# Altium PCB PCB1.PcbDoc (part 3 of 4)
Units mm, origin at the board's own origin, x right, y up, seen from the top; angles counter-clockwise.
Board outline 100 x 100 mm, 4 copper layers (Component Side 1, Ground Plane, Power Plane, Component Side 2), stack 0.844 mm thick; 174 components, 192 nets, 1098 pads, 545 vias.
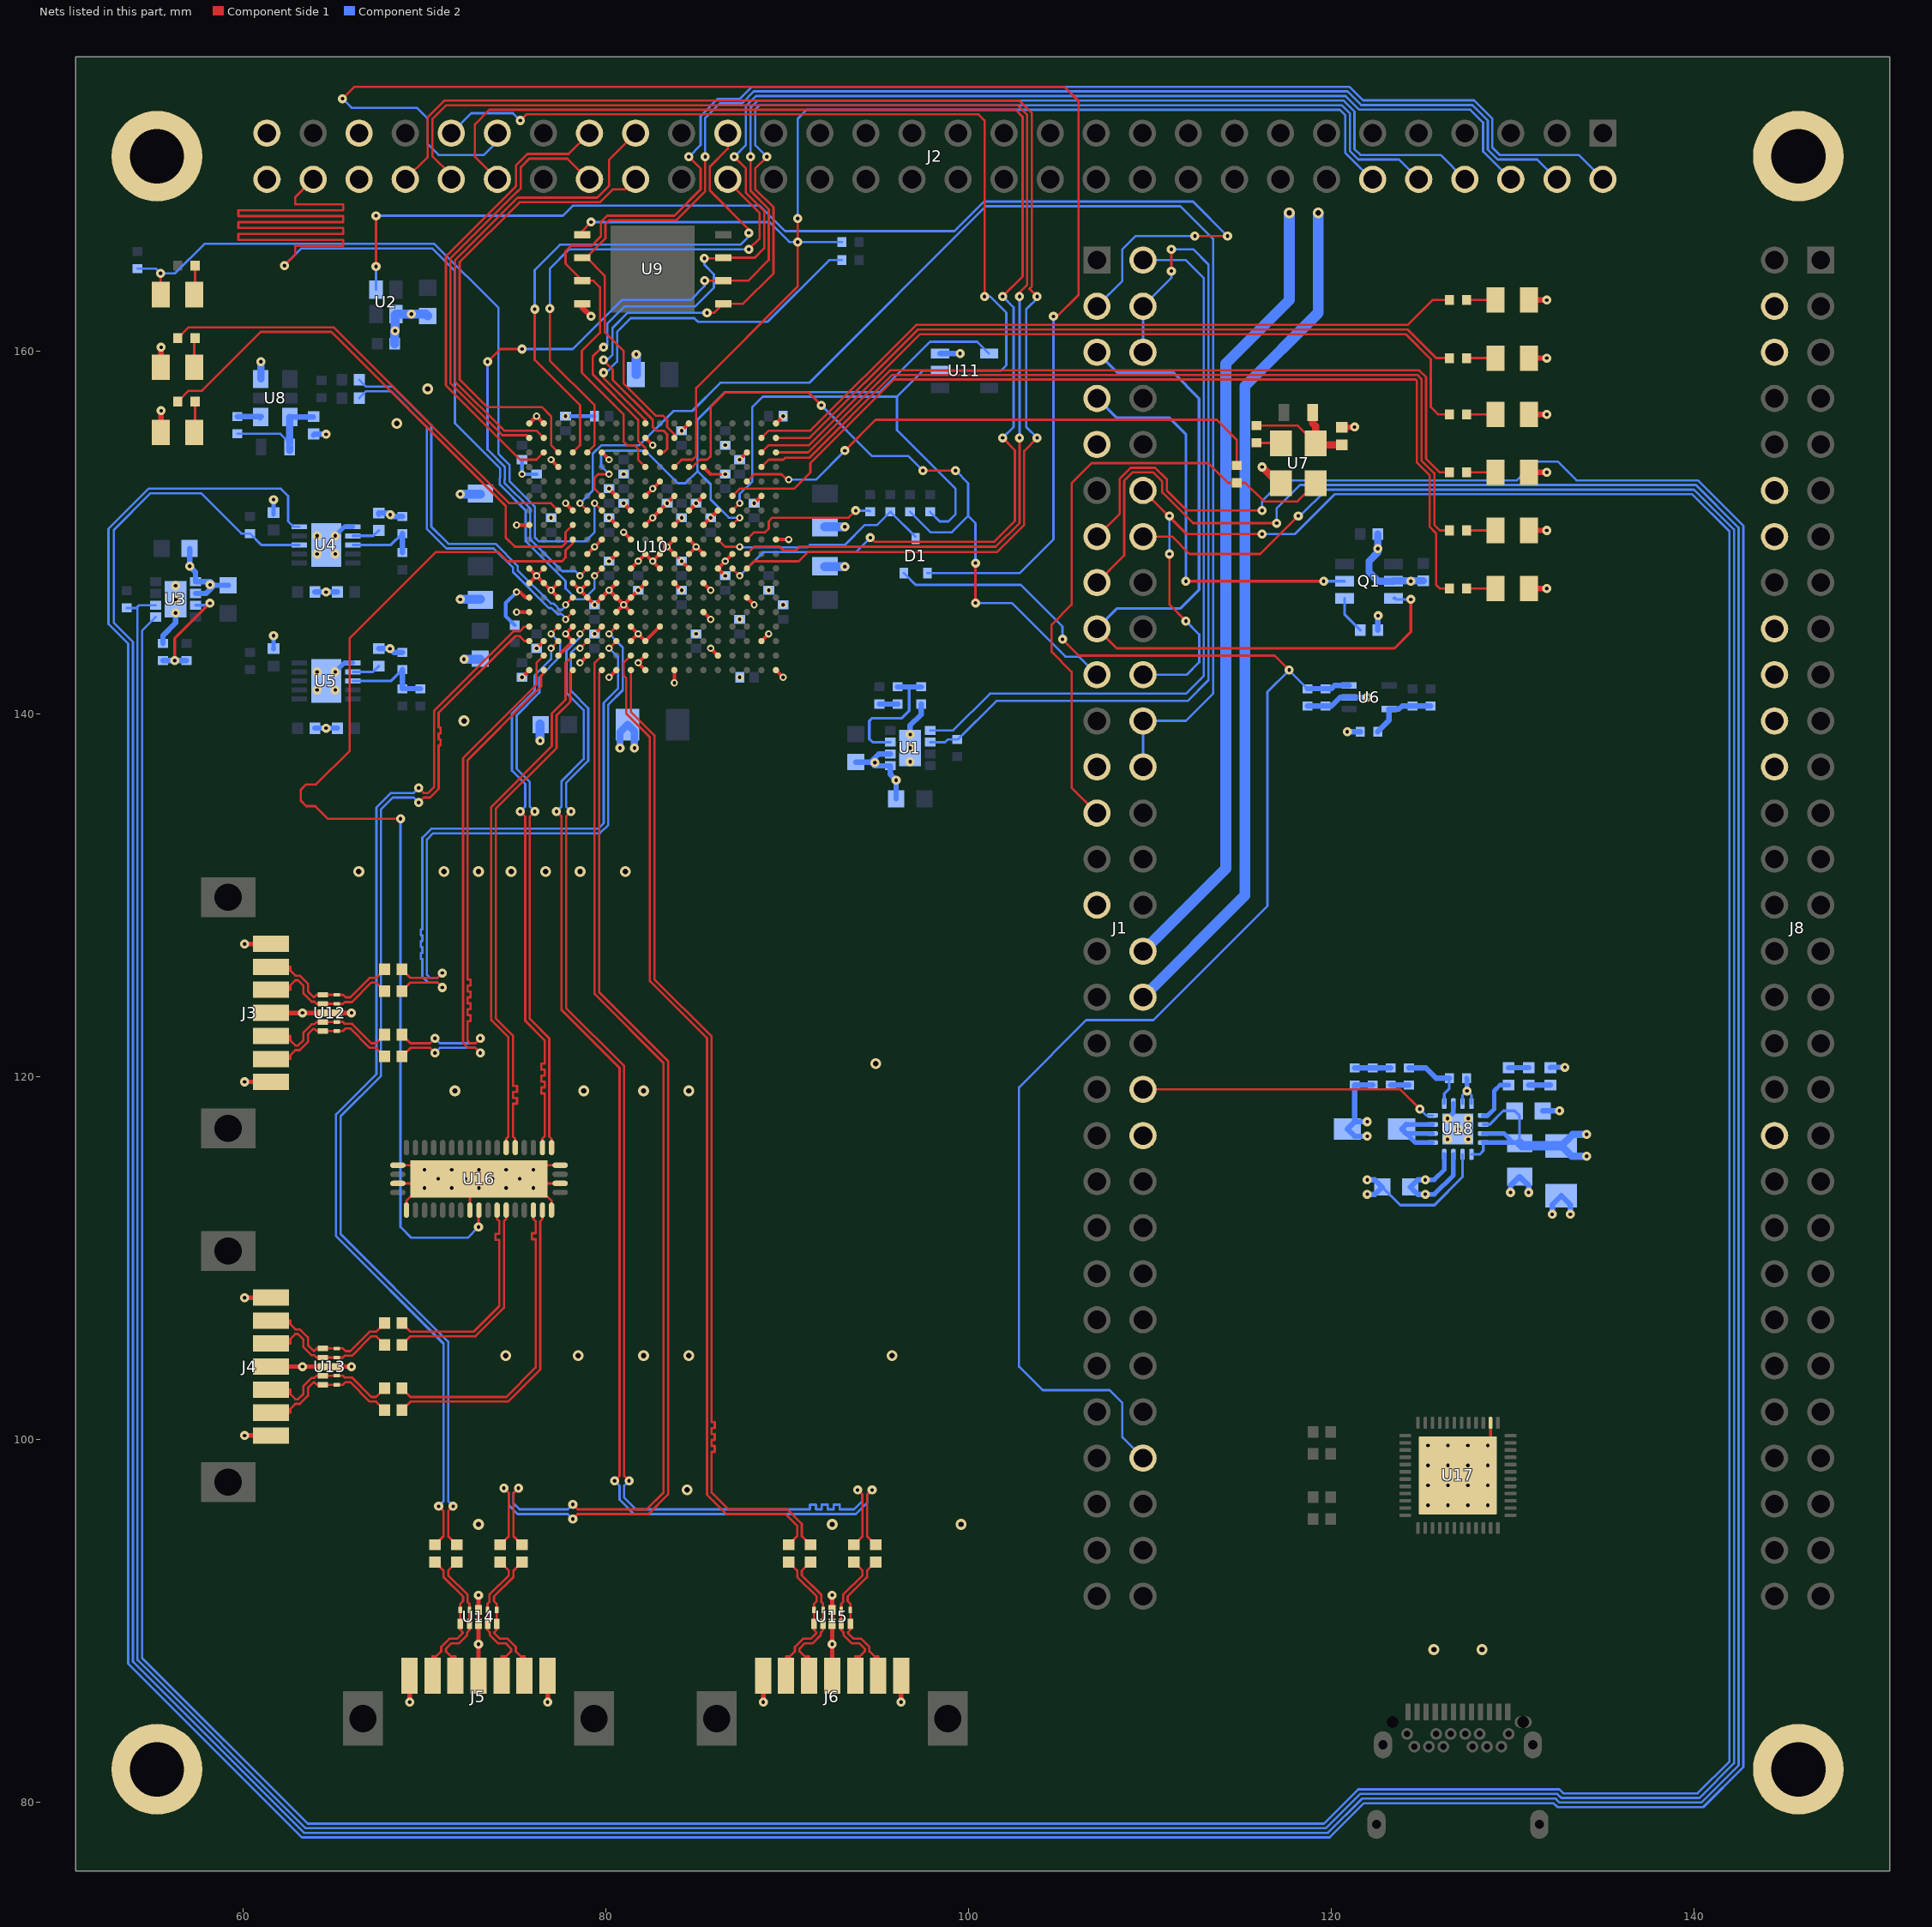
[diagram p4: the nets of this part, all layers, seen from the top]

## Via types
v1: diameter 0.5, hole 0.2, Component Side 1 to Component Side 2, 344 vias
v2: diameter 0.4, hole 0.2, Component Side 1 to Component Side 2, tented top, 149 vias
v3: diameter 0.6, hole 0.3, Component Side 1 to Component Side 2, 33 vias
v4: diameter 0.5, hole 0.2, Component Side 1 to Component Side 2, tented top, 14 vias
v5: diameter 0.5, hole 0.2, Component Side 1 to Component Side 2, tented bottom, 5 vias

## Nets (pads, with @x,y where several pads share a name; then routed paths per layer and width w, separated by ;. In a path a pad name is that pad's centre, name@x,y a point inside that pad or via, vN(x,y) a via of type N, cw(c..) or ccw(c..) an arc to the next point about the centre after c; other vN are vias at no path point) (continued)
B15_L14_N: J2.39 U10.D16 | length 30.8
  Component Side 1 w0.127: v1(76.1,162.3) 76.1,159.5 78.6,157 78.6,154.8 U10.D16@78.2,154.4 ; J2.39@86.74,172 86.74,171.14 85.754,170.154 85.754,168.846 87.9,166.7 v1(87.9,166.5)
  Component Side 2 w0.127: v1(76.1,162.3) 76.1,164.459 77.495,165.854 87.454,165.854 87.9,166.3 v1(87.9,166.5)
B15_L14_P: J2.40 U10.E16 | length 27.6
  Component Side 1 w0.127: v1(76.929,162.329) 76.929,159.471 79.4,157 79.4,154.8 U10.E16@79,154.4 ; J2.40@86.74,169.46 86.74,169.36 88.5,167.6 88.5,166.2 v1(87.9,165.6)
  Component Side 2 w0.127: v1(76.929,162.329) 76.929,164.529 78,165.6 v1(87.9,165.6)
B15_L15_N: J2.46 U10.A17 | length 23.6
  Component Side 1 w0.127: U10.A17@75.8,155.2 75.654,155.346 74.313,155.346 71.454,158.205 71.454,165.101 75.132,168.779 75.138,168.779 75.329,168.97 75.329,170.129 75.8,170.6 77.9,170.6 79.04,169.46 J2.46@79.12,169.46
B15_L15_P: J2.45 U10.B16 | length 25.8
  Component Side 1 w0.127: U10.B16@76.6,154.4 76.2,154 75.3,154 71.2,158.1 71.2,165.206 75.027,169.033 75.033,169.033 75.075,169.075 75.075,170.234 75.695,170.854 77.974,170.854 J2.45@79.12,172
B15_L16_N: J2.43 U10.B17 | length 26.6
  Component Side 1 w0.127: U10.B17@76.6,155.2 76.2,155.6 74.418,155.6 71.708,158.31 71.708,164.996 75.156,168.444 79.544,168.444 80.2,169.1 80.2,170.54 J2.43@81.66,172
B15_L16_P: J2.44 U10.C16 | length 26.1
  Component Side 1 w0.127: U10.C16@77.4,154.4 77,154.8 77,156.4 76.5,156.9 73.478,156.9 71.962,158.416 71.962,164.89 75.261,168.19 79.69,168.19 80.4,168.9 81.1,168.9 J2.44@81.66,169.46
BOOTMODE: J2.51 R27.2 U10.R12 U11.2 | length 75.2
  Component Side 1 w0.127: v1(75.3,172.7) 75.635,173.035 100.565,173.035 100.9,172.7 v1(100.9,163) ; U10.R12@87,151.2 v2(87.4,151.6)
  Component Side 2 w0.127: J2.51@71.5,172 72.6,173.1 74.9,173.1 v1(75.3,172.7) ; v2(87.4,151.6) 87.4,152.1 88.1,152.8 88.1,156.9 88.675,157.475 96.075,157.475 ; R27.2@97.9,151.125 98.425,150.6 98.9,150.6 99.3,151 99.3,152.4 96.075,155.625 96.075,157.475 ; v1(100.9,163) 101.2,163 102.1,162.1 102.1,159.2 101.8,158.9 U11.2@98.45,158.9 97.5,158.9 96.075,157.475
BOOTMODE_INV: U10.F13 U10.R11 U11.4 | length 35.2
  Component Side 1 w0.127: U10.F13@79.8,152 79.4,152.4 79.4,153 79.6,153.2 v2(80.2,153.2) ; U10.R11@87,150.4 v2(87.4,150.8)
  Component Side 2 w0.127: v2(80.2,153.2) 79.759,153.64 79.759,154.259 80,154.5 82.2,154.5 84,152.7 84.4,152.7 85.071,153.371 ; 85.085,153.385 85.071,153.371 ; v2(87.4,150.8) 86.8,150.8 85.8,151.8 85.8,152.642 85.071,153.371 ; U11.4@101.15,159.85 100.5,160.5 97.9,160.5 95.129,157.729 86.588,157.729 85.071,156.212 85.071,153.371
CFGVBS: J1.22 J1.24 U10.E12 | length 76.3
  Component Side 1 w0.127: v2(78.6,151.6) U10.E12@79,151.2
  Component Side 2 w0.127: v2(78.6,151.6) 79.3,152.3 79.3,154.322 79.778,154.8 81.871,154.8 83.755,156.684 84.783,156.684 86.336,158.237 91.237,158.237 100.975,167.975 111.7,167.975 113.5,166.175 113.5,141.1 112,139.6 J1.22@109.64,139.6 J1.24@109.64,137.06
CLK_25M: J1.25 R31.2 U7.3 | length 34.9
  Component Side 1 w0.127: J1.25@107.1,134.52 105.7,135.92 105.7,142.3 104.6,143.4 104.6,144.9 105.7,146 105.7,152.7 106.808,153.808 113.238,153.808 114.321,152.725 R31.2@114.8,152.725 115.275,152.725 116.3,151.7 118.15,151.7 U7.3@119.15,152.7
CLK_200M_N: C20.1 U10.D5 | length 20.8
  Component Side 1 w0.127: v2(77.8,145.2) U10.D5@78.2,145.6
  Component Side 2 w0.127: C20.1@66.43,157.4 66.803,157.773 68.168,157.773 70.146,155.795 70.146,150.195 71.233,149.108 73.833,149.108 74.905,148.036 74.905,147.795 76.88,145.82 77.02,145.82 77.368,145.473 77.6,145.473 77.8,145.273 v2(77.8,145.2)
CLK_200M_P: C21.1 U10.D6 | length 20.8
  Component Side 1 w0.127: v2(77.8,146) U10.D6@78.2,146.4
  Component Side 2 w0.127: C21.1@66.43,158.4 66.803,158.027 68.273,158.027 70.4,155.9 70.4,150.3 71.338,149.362 73.938,149.362 75.159,148.141 75.159,147.9 76.985,146.074 77.126,146.074 77.2,146 77.473,145.727 77.6,145.727 77.8,145.927 v2(77.8,146)
DBG_GLED: R34.2 U10.C12 | length 25.4
  Component Side 1 w0.127: R34.2@56.425,160.7 57.025,161.3 65,161.3 74.7,151.6 77,151.6 U10.C12@77.4,151.2
DBG_RLED: R33.2 U10.D11 | length 30.1
  Component Side 1 w0.127: R33.2@56.425,157.2 57.025,157.8 57.75,157.8 60.996,161.046 64.895,161.046 74.5,151.441 74.5,149.7 75,149.2 77.6,149.2 77.8,149.4 77.8,150 U10.D11@78.2,150.4
DONE: D2.1 R24.2 U10.F12 | length 42.6
  Component Side 1 w0.127: D2.1@55.475,163.1 v1(55.475,164.275) ; v2(79.4,151.6) U10.F12@79.8,151.2
  Component Side 2 w0.127: R24.2@54.2,164.525 55.225,164.525 v1(55.475,164.275) 56.275,164.275 57.9,165.9 70.559,165.9 74.1,162.359 74.1,154.318 74.708,153.71 74.708,152.81 75.9,151.618 76.108,151.41 76.108,149.71 76.318,149.5 78.9,149.5 79.4,150 v2(79.4,151.6)
GND: C1.1 C2.1 C3.1 C4.1 C5.1 C6.1 C7.1 C8.1 C9.1 C10.1 C11.1 C12.1 C13.1 C14.1 C15.1 C16.1 C17.1 C18.2 C19.2 C42.2 C43.2 C44.1 C47.1 C48.2 C49.1 C50.1 C51.1 C52.1 C53.1 C54.1 C55.1 C56.1 C57.1 C58.1 C59.1 C60.1 C61.2 C62.2 C63.2 C64.2 C65.2 C66.2 C67.1 C68.2 C69.1 C70.1 C71.1 C72.1 C73.1 C74.1 C75.1 C76.1 C77.1 C78.1 C79.1 C80.1 C81.1 C82.1 C83.1 C84.1 C85.1 C86.1 C87.1 C88.1 C89.1 D3.1 D4.1 D5.1 D6.1 D7.1 D8.1 D9.1 D10.1 J1.9 J1.23 J1.29 J2.59 J2.60 J3.1 J3.4 J3.7 J4.1 J4.4 J4.7 J5.1 J5.4 J5.7 J6.1 J6.4 J6.7 J8.12 J8.14 J8.22 J8.24 J8.40 pad. Q1.2 R3.1 R7.1 R9.2 R12.1 R17.1 R18.1 R19.1 R36.1 U1.5 U1.6 U1.9 U2.4 U3.5 U3.6 U3.9 U4.6 U4.11 U5.6 U5.11 U6.2 U7.2 U8.3 U9.4 U10.A1 U10.A5 U10.A7 U10.A8 U10.A11 U10.A18 U10.B3 U10.B7 U10.B8 U10.B18 U10.C2 U10.C6 U10.C7 U10.C15 U10.D3 U10.D4 U10.D7 U10.D12 U10.E2 U10.E6 U10.E7 U10.E9 U10.F4 U10.F6 U10.F10 U10.F16 U10.G1 U10.G5 U10.G6 U10.G7 U10.G9 U10.G11 U10.G13 U10.H3 U10.H4 U10.H5 U10.H6 U10.H8 U10.H10 U10.H12 U10.J1 U10.J2 U10.J3 U10.J7 U10.J9 U10.J11 U10.J13 U10.J17 U10.K4 U10.K8 U10.K9 U10.K10 U10.K12 U10.K14 U10.L1 U10.L7 U10.L9 U10.L10 U10.L11 U10.L13 U10.M8 U10.M9 U10.M10 U10.M12 U10.M18 U10.N5 U10.N7 U10.N9 U10.N11 U10.N13 U10.N15 U10.P2 U10.P8 U10.P12 U10.R9 U10.T6 U10.T16 U10.U3 U10.U13 U10.V1 U10.V10 U10.V18 U11.3 U12.3 U12.8 U13.3 U13.8 U14.3 U14.8 U15.3 U15.8 U16.18 U16.20 U16.22 U16.29 U16.38 U16.40 U16.42 U16.43 U17.38 U17.49 U18.6 U18.7 U18.8 U18.15 U18.16 U18.17 | length 188
  Component Side 1 w0.127: U16.20@68.55,114.1 69.775,114.1 v4(70.025,113.85) 69.725,113.85 69.025,113.15 U16.22@69.025,112.625 ; U16.18@68.55,115.1 72.275,115.1 U16.43@73.025,114.35 ; U16.29@72.525,112.625 72.525,113.85 U16.43@73.025,114.35 ; v2(76.2,147.6) U10.B8@76.6,148 ; U16.38@77.025,112.625 77.025,113.15 76.325,113.85 v4(76.025,113.85) 76.275,114.1 U16.40@77.5,114.1 ; U16.42@77.5,115.1 73.775,115.1 U16.43@73.025,114.35 ; U10.L9@83.8,148.8 v2(84.2,148.4) ; v2(86.6,153.2) v2@86.612,153.211
  Component Side 1 w0.149: 85.8,153.2 v2(86.6,153.2)
  Component Side 1 w0.153: U17.49@127,98 128.8,99.8 U17.38@128.8,100.9
  Component Side 1 w0.2: v2(75.1,145.6) U10.A5@75.8,145.6 ; v2(75.1,150.4) U10.A11@75.8,150.4 ; v2(75.4,142) U10.A1@75.8,142.4 ; U10.A7@75.8,147.2 v2(76.2,147.6) ; U10.A8@75.8,148 v2(76.2,147.6) ; U10.A18@75.8,156 v2(76.2,156.4) U10.B18@76.6,156 ; v2(76.2,143.6) U10.B3@76.6,144 ; v2(77,154) U10.C15@77.4,153.6 ; U10.C2@77.4,143.2 U10.D3@78.2,144 v2(77.8,144.4) U10.D4@78.2,144.8 ; U10.C6@77.4,146.4 v2(77,146.8) ; U10.C7@77.4,147.2 v2(77,146.8) ; v2(77.8,151.6) U10.D12@78.2,151.2 ; U10.D7@78.2,147.2 v2(78.6,146.8) ; v2(78.6,142.8) U10.E2@79,143.2 ; U10.E7@79,147.2 v2(78.6,146.8) ; U10.E9@79,148.8 v2(79.4,149.2) ; v2(79.4,144.4) U10.F4@79.8,144.8 ; v2(79.4,149.2) U10.F10@79.8,149.6 ; U10.F16@79.8,154.4 v2(80.2,154) ; v2(80.2,142) U10.G1@80.6,142.4 ; v2(80.2,148.4) U10.G9@80.6,148.8 ; v2(80.2,150.8) U10.G11@80.6,150.4 ; v2(80.2,152.4) U10.G13@80.6,152 ; U10.G5@80.6,145.6 v2(81,146) ; U10.G7@80.6,147.2 v2(80.2,146.8) ; v2(81,150) U10.H10@81.4,149.6 ; v2(81,151.6) U10.H12@81.4,151.2 ; U10.H3@81.4,144 v2(81.8,144.4) ; U10.H4@81.4,144.8 v2(81.8,144.4) ; U10.H5@81.4,145.6 v2(81,146) ; U10.H8@81.4,148 v2(81.8,148.4) U10.J9@82.2,148.8 v2(82.6,148.4) ; U10.J1@82.2,142.4 v2(81.8,142.8) U10.J2@82.2,143.2 ; U10.J7@82.2,147.2 v2(81.8,146.8) v2(81,146) ; U10.J11@82.2,150.4 v2(82.6,150.8) U10.K12@83,151.2 v2(83.4,151.6) U10.L13@83.8,152 ; U10.J13@82.2,152 v2(82.6,152.4) U10.K14@83,152.8 ; U10.J17@82.2,155.2 v2(82.6,154.8) ; U10.K4@83,144.8 U10.J3@82.2,144 v2(81.8,144.4) ; U10.K8@83,148 v2(82.6,148.4) ; U10.K10@83,149.6 v2(83.4,149.2) ; v2(83.8,141.7) U10.L1@83.8,142.4 ; U10.L7@83.8,147.2 v2(84.2,146.8) ; U10.L9@83.8,148.8 v2(83.4,149.2) ; U10.L10@83.8,149.6 v2(83.4,149.2) ; U10.L11@83.8,150.4 v2(84.2,150.8) ; v2(84.2,148.4) U10.M8@84.6,148 ; v2(84.2,155.6) U10.M18@84.6,156 ; U10.M9@84.6,148.8 v2(85,149.2) ; U10.M10@84.6,149.6 v2(85,149.2) ; U10.M12@84.6,151.2 v2(85,151.6) U10.N13@85.4,152 ; U10.N5@85.4,145.6 v2(85.8,145.2) ; U10.N7@85.4,147.2 v2(85.8,146.8) ; U10.N9@85.4,148.8 v2(85,149.2) ; U10.N11@85.4,150.4 v2(85.8,150.8) U10.P12@86.2,151.2 ; U10.N15@85.4,153.6 85.8,153.2 ; v2(85.8,143.6) U10.P2@86.2,143.2 ; v2(86.6,147.6) U10.P8@86.2,148 v2(86.6,148.4) U10.R9@87,148.8 ; v2(87.4,154) U10.T16@87.8,154.4 ; U10.T6@87.8,146.4 v2(88.2,146) ; v2(88.2,151.6) U10.U13@88.6,152 ; U10.U3@88.6,144 v2(89,144.4) ; U10.V1@89.4,142.4 v2(89.8,142) ; U10.V10@89.4,149.6 v2(90.1,149.6) ; U10.V18@89.4,156 v2(89.8,156.4) ; v2(76.2,147.6) U10.B7@76.6,147.2 v2(77,146.8) ; v2(78.6,146.8) U10.E6@79,146.4 v2(79.4,146) v2(80.2,146.8) ; v2(80.2,146.8) v2(81,146) ; v2(82.6,148.4) U10.K9@83,148.8 v2(83.4,149.2)
  Component Side 1 w0.254: v1(60.1,100.2) J4.1@61.557,100.2 ; v1(60.1,107.8) J4.7@61.557,107.8 ; v1(60.1,119.7) J3.1@61.557,119.7 ; v1(60.1,127.3) J3.7@61.557,127.3 ; J4.4@61.557,104.001 J4.4@61.557,104.001 v1(63.3,104) U13.3@64.415,104 U13.8@65.185,104 v1(66,104) ; J3.4@61.557,123.501 J3.4@61.557,123.501 v1(63.3,123.5) U12.3@64.415,123.5 U12.8@65.185,123.5 v1(66,123.5) ; J5.7@69.189,86.957 69.2,86.946 v1(69.2,85.5) ; J5.4@72.999,86.957 J5.4@72.999,86.957 v1(73,88.7) U14.3@73,89.815 U14.8@73,90.585 v1(73,91.4) ; v1(76.809,85.509) J5.1@76.809,86.957 ; J6.7@88.689,86.957 88.7,86.946 v1(88.7,85.5) ; J6.4@92.499,86.957 J6.4@92.499,86.957 v1(92.5,88.7) U15.3@92.5,89.815 U15.8@92.5,90.585 v1(92.5,91.4) ; v1(96.3,85.5) J6.1@96.3,86.957
  Component Side 1 w0.3: D3.1@55.475,155.5 55.5,155.525 v1(55.5,156.7) ; D4.1@55.475,159.1 55.5,159.125 v1(55.5,160.2) ; U9.4@78.71,162.595 78.71,162.39 v1(79.2,161.9) ; U7.2@117.1,152.7 117.25,152.85 U7.2@117.25,152.7 ; C18.2@120.6,155.78 121.38,155.78 121.36,155.8 v1(121.3,155.8) ; D9.1@130.925,146.9 v1(131.9,146.9) ; D5.1@130.925,150.1 v1(131.9,150.1) ; D7.1@130.925,153.3 v1(131.9,153.3) ; D10.1@130.925,156.5 v1(131.9,156.5) ; D6.1@130.925,159.6 v1(131.9,159.6) ; D8.1@130.925,162.8 v1(131.9,162.8)
  Component Side 1 w0.4: v1(116.2,153.6) U7.2@117.1,152.7
  Component Side 2 w0.127: C50.1@76.4,139.425 C50.1@76.425,139.4
  Component Side 2 w0.152: U18.7@127.25,118.5 127.25,118.95 v1(127.5,119.2) 127.75,118.95 U18.8@127.75,118.5
  Component Side 2 w0.2: C76.1@75.4,154 v2(75.4,153.2) C71.1@76.2,153.2 ; v2(77.8,156.4) C72.1@79.4,156.4
  Component Side 2 w0.25: v1(125.2,113.5) 125.7,113.5 126.75,114.55 U18.15@126.75,115.7 ; v1(125.2,114.3) 125.7,114.3 126.25,114.85 U18.16@126.25,115.7 ; v5(126.425,117.675) 126.75,118 U18.6@126.75,118.5
  Component Side 2 w0.254: C16.1@61.7,143.58 v1(61.7,144.3) ; C12.1@61.7,150.98 C12.1@61.7,151.08 v1(61.7,151.8) ; v1(65.1,142.3) 65.6,142.8 U5.6@66.075,142.8 ; v1(65.1,149.8) 65.6,150.3 U4.6@66.075,150.3 ; R36.1@127.475,119.9 127.5,119.875 v1(127.5,119.2)
  Component Side 2 w0.3: R7.1@55.6,143.875 55.6,144.3 56.3,145 v1(56.3,145.55) ; C8.1@57.075,149.1 v1(57.075,148.125) 57.4,147.8 U3.5@57.4,147.275 58.225,147.275 v1@58.425,147.075 ; U3.6@57.4,146.625 57.975,146.625 v1@58.425,147.075 ; C9.1@59.2,147.075 v1@58.425,147.075 ; C19.2@63.9,155.351 63.949,155.4 v1(64.6,155.4) ; C14.1@63.98,139.2 v1(64.6,139.2) C15.1@65.22,139.2 ; C10.1@63.98,146.7 v1(64.6,146.7) C11.1@65.22,146.7 ; C17.1@67.5,143.58 v1(68.12,143.58) 68.325,143.375 R12.1@68.8,143.375 ; C13.1@67.5,150.98 C13.1@67.58,151.06 ; C13.1@67.5,151.06 C13.1@67.58,151.06 ; R9.2@68.8,150.875 68.225,150.875 v1(68.133,150.967) 68.04,151.06 C13.1@67.58,151.06 ; C49.1@73.075,143 C49.1@73.1,143.025 ; C2.1@93.8,137.325 v1@94.625,137.325 ; U1.6@95.7,137.775 95.075,137.775 v1@94.625,137.325 ; C1.1@96.025,135.3 v1(96.025,136.325) 95.7,136.65 U1.5@95.7,137.125 94.825,137.125 v1@94.625,137.325 ; v1(96.8,138.85) 96.8,139.35 97.4,139.95 R3.1@97.4,140.525 ; U11.3@98.45,159.85 v1(99.55,159.85) ; R18.1@118.7,140.425 R17.1@119.7,140.425 120.025,140.425 120.5,140.9 U6.2@121,140.9 v1(122,140.9) ; v1(120.9,139) R19.1@121.625,139 ; C5.1@122.58,144.6 122.58,145.38 v1(122.6,145.4) ; v1(125.2,113.5) 124.775,113.5 C48.2@124.375,113.9 124.775,114.3 v1(125.2,114.3) ; v1(129.9,113.6) 129.9,113.975 C42.2@130.4,114.475 130.9,113.975 v1(130.9,113.6) ; C44.1@131.675,118.1 v1(132.6,118.1) ; C47.1@132.1,120.48 132.12,120.5 v1(132.9,120.5) ; v1(132.2,112.4) 132.2,112.925 C43.2@132.7,113.425 133.2,112.925 v1(133.2,112.4)
  Component Side 2 w0.4: U8.3@61,158.45 v1(61,159.4) ; v1(80.8,138.1) 80.8,138.975 C55.1@81.225,139.4 81.6,139.025 v1(81.6,138.1) ; C7.1@122.58,149.9 v1(122.58,149.1) 122.58,148.88 122.1,148.4 122.1,147.8 122.6,147.3 Q1.2@123.45,147.3 123.47,147.32 C6.1@125.1,147.32
  Component Side 2 w0.5: C3.1@68.38,160.4 68.38,161.08 v1(68.4,161.1) 68.4,161.975 U2.4@68.45,162.025 v1(69.3,162.025) 70.1,162.025 C4.1@70.2,161.925 ; v1(72,146.3) C67.1@73.1,146.3 ; v1(72,152.1) C70.1@73.1,152.1 ; v1(72.2,143) C49.1@73.075,143 ; v1(76.4,138.5) C50.1@76.4,139.425 ; C61.2@81.7,158.7 v1(81.7,159.8) ; C83.1@92.1,148.1 v1(93.2,148.1) ; C69.1@92.1,150.3 v1(93.2,150.3)
  other v1: 125.35,96.35 126.45,96.35 127.55,96.35 128.65,96.35 125.35,97.45 126.45,97.45 127.55,97.45 128.65,97.45 125.35,98.55 126.45,98.55 127.55,98.55 128.65,98.55 125.35,99.65 126.45,99.65 127.55,99.65 128.65,99.65 94.85,137.3 96.8,137.35 96.8,138.1 64.1,141.3 65.1,141.3 64.1,142.3 56.3,146.3 56.3,147.05 58.2,147.1 124.4,147.3 64.1,148.8 65.1,148.8 64.1,149.8
  other v2: 87.4,142 85,144.4 87.4,145.2 89.8,146 89,146.8 77,150.8 81,153.2 86.6,154.8
  other v3: 125.673,88.4 128.327,88.4 73,95.3 92.5,95.3 99.6,95.3 84.5,97.2 74.5,104.6 78.5,104.6 82.1,104.6 84.6,104.6 95.8,104.6 71.7,119.2 78.8,119.2 82.1,119.2 84.6,119.2 94.9,120.7 66.4,131.3 71.1,131.3 73,131.3 74.8,131.3 76.7,131.3 78.6,131.3 81.1,131.3 72.2,139.6 68.5,156 70.2,157.9
  other v4: 71.525,113.85 73.025,113.85 74.525,113.85 70.775,114.35 72.275,114.35 73.775,114.35 75.275,114.35 70.025,114.85 71.525,114.85 73.025,114.85 74.525,114.85 76.025,114.85
  other v5: 126.425,116.525 127.575,116.525 127,117.1 127.575,117.675
INIT: R25.2 U10.T10 | length 7.7
  Component Side 1 w0.127: U10.T10@87.8,149.6 88.2,150 88.8,150 89,150.2 89,150.6 89.2,150.8 93.41,150.8 v1(93.8,151.19)
  Component Side 2 w0.127: v1(93.8,151.19) 94.56,151.19 R25.2@94.6,151.15
J3_RX_N: C24.2 J3.5 U12.2 U12.9 | length 8.1
  Component Side 1 w0.127: J3.5@61.557,124.771 62.62,124.771 62.62,125.021 62.9,125.3 63.046,125.3 63.346,125 63.346,124.572 63.795,124.123 63.953,124.123 64.076,124 U12.2@64.415,124 U12.9@65.185,124 65.524,124 65.623,124.1 66.027,124.1 67.1,125.173 67.347,125.173 C24.2@67.82,124.7
J3_RX_P: C25.2 J3.6 U12.1 U12.10 | length 8.1
  Component Side 1 w0.127: J3.6@61.557,126.041 62.62,126.041 62.62,125.833 62.9,125.554 63.151,125.554 63.6,125.105 63.6,124.677 63.9,124.377 63.953,124.377 64.076,124.5 U12.1@64.415,124.5 U12.10@65.185,124.5 65.524,124.5 65.67,124.354 65.922,124.354 66.995,125.427 67.347,125.427 C25.2@67.82,125.9
J3_TX_N: C23.2 J3.3 U12.4 U12.7 | length 8.1
  Component Side 1 w0.127: J3.3@61.557,122.231 62.62,122.231 62.62,121.979 62.9,121.7 63.046,121.7 63.346,122 63.346,122.428 63.795,122.877 63.953,122.877 64.076,123 U12.4@64.415,123 U12.7@65.185,123 65.524,123 65.623,122.9 66.027,122.9 67.1,121.827 67.347,121.827 C23.2@67.82,122.3
J3_TX_P: C22.2 J3.2 U12.5 U12.6 | length 8.1
  Component Side 1 w0.127: J3.2@61.557,120.961 62.62,120.961 62.62,121.166 62.9,121.446 63.151,121.446 63.6,121.895 63.6,122.323 63.9,122.623 63.953,122.623 64.076,122.5 U12.5@64.415,122.5 U12.6@65.185,122.5 65.524,122.5 65.67,122.646 65.922,122.646 66.995,121.573 67.347,121.573 C22.2@67.82,121.1
J4_RX_N: C28.2 J4.5 U13.2 U13.9 | length 8.1
  Component Side 1 w0.127: J4.5@61.557,105.271 62.62,105.271 62.62,105.52 62.9,105.8 63.046,105.8 63.346,105.5 63.346,105.072 63.795,104.623 63.953,104.623 64.076,104.5 U13.2@64.415,104.5 U13.9@65.185,104.5 65.524,104.5 65.623,104.6 66.027,104.6 67.1,105.673 67.347,105.673 C28.2@67.82,105.2
J4_RX_P: C29.2 J4.6 U13.1 U13.10 | length 8.1
  Component Side 1 w0.127: J4.6@61.557,106.541 62.62,106.541 62.62,106.333 62.9,106.054 63.151,106.054 63.6,105.605 63.6,105.177 63.9,104.877 63.953,104.877 64.076,105 U13.1@64.415,105 U13.10@65.185,105 65.524,105 65.67,104.854 65.922,104.854 66.995,105.927 67.347,105.927 C29.2@67.82,106.4
J4_TX_N: C27.2 J4.3 U13.4 U13.7 | length 8.1
  Component Side 1 w0.127: J4.3@61.557,102.731 62.62,102.731 62.62,102.48 62.9,102.2 63.046,102.2 63.346,102.5 63.346,102.928 63.795,103.377 63.953,103.377 64.076,103.5 U13.4@64.415,103.5 U13.7@65.185,103.5 65.524,103.5 65.623,103.4 66.027,103.4 67.1,102.327 67.347,102.327 C27.2@67.82,102.8
J4_TX_P: C26.2 J4.2 U13.5 U13.6 | length 8.1
  Component Side 1 w0.127: J4.2@61.557,101.461 62.62,101.461 62.62,101.666 62.9,101.946 63.151,101.946 63.6,102.395 63.6,102.823 63.9,103.123 63.953,103.123 64.076,103 U13.5@64.415,103 U13.6@65.185,103 65.524,103 65.67,103.146 65.922,103.146 66.995,102.073 67.347,102.073 C26.2@67.82,101.6
J5_RX_N: C32.2 J5.5 U14.2 U14.9 | length 8.1
  Component Side 1 w0.127: J5.5@71.729,86.957 71.729,88.02 71.48,88.02 71.2,88.3 71.2,88.446 71.5,88.746 71.928,88.746 72.377,89.195 72.377,89.353 72.5,89.476 U14.2@72.5,89.815 U14.9@72.5,90.585 72.5,90.924 72.4,91.023 72.4,91.427 71.327,92.5 71.327,92.747 C32.2@71.8,93.22
J5_RX_P: C33.2 J5.6 U14.1 U14.10 | length 8.1
  Component Side 1 w0.127: J5.6@70.459,86.957 70.459,88.02 70.667,88.02 70.946,88.3 70.946,88.551 71.395,89 71.823,89 72.123,89.3 72.123,89.353 72,89.476 U14.1@72,89.815 U14.10@72,90.585 72,90.924 72.146,91.07 72.146,91.322 71.073,92.395 71.073,92.747 C33.2@70.6,93.22
J5_TX_N: C31.2 J5.3 U14.4 U14.7 | length 8.1
  Component Side 1 w0.127: C31.2@74.2,93.22 74.673,92.747 74.673,92.5 73.6,91.427 73.6,91.023 73.5,90.924 U14.7@73.5,90.585 U14.4@73.5,89.815 73.5,89.476 73.623,89.353 73.623,89.195 74.072,88.746 74.5,88.746 74.8,88.446 74.8,88.3 74.521,88.02 74.269,88.02 J5.3@74.269,86.957
J5_TX_P: C30.2 J5.2 U14.5 U14.6 | length 8.1
  Component Side 1 w0.127: C30.2@75.4,93.22 74.927,92.747 74.927,92.395 73.854,91.322 73.854,91.07 74,90.924 U14.6@74,90.585 U14.5@74,89.815 74,89.476 73.877,89.353 73.877,89.3 74.177,89 74.605,89 75.054,88.551 75.054,88.3 75.334,88.02 75.539,88.02 J5.2@75.539,86.957
J6_RX_N: C36.2 J6.5 U15.2 U15.9 | length 8.1
  Component Side 1 w0.127: J6.5@91.229,86.957 91.229,88.02 90.979,88.02 90.7,88.3 90.7,88.446 91,88.746 91.428,88.746 91.877,89.195 91.877,89.353 92,89.476 U15.2@92,89.815 U15.9@92,90.585 92,90.924 91.9,91.023 91.9,91.427 90.827,92.5 90.827,92.747 C36.2@91.3,93.22
J6_RX_P: C37.2 J6.6 U15.1 U15.10 | length 8.1
  Component Side 1 w0.127: J6.6@89.959,86.957 89.959,88.02 90.166,88.02 90.446,88.3 90.446,88.551 90.895,89 91.323,89 91.623,89.3 91.623,89.353 91.5,89.476 U15.1@91.5,89.815 U15.10@91.5,90.585 91.5,90.924 91.646,91.07 91.646,91.322 90.573,92.395 90.573,92.747 C37.2@90.1,93.22
J6_TX_N: C35.2 J6.3 U15.4 U15.7 | length 8.1
  Component Side 1 w0.127: C35.2@93.7,93.22 94.173,92.747 94.173,92.5 93.1,91.427 93.1,91.023 93,90.924 U15.7@93,90.585 U15.4@93,89.815 93,89.476 93.123,89.353 93.123,89.195 93.572,88.746 94,88.746 94.3,88.446 94.3,88.3 94.02,88.02 93.769,88.02 J6.3@93.769,86.957
J6_TX_P: C34.2 J6.2 U15.5 U15.6 | length 8.1
  Component Side 1 w0.127: C34.2@94.9,93.22 94.427,92.747 94.427,92.395 93.354,91.322 93.354,91.07 93.5,90.924 U15.6@93.5,90.585 U15.5@93.5,89.815 93.5,89.476 93.377,89.353 93.377,89.3 93.677,89 94.105,89 94.554,88.551 94.554,88.3 94.833,88.02 95.039,88.02 J6.2@95.039,86.957
LED1: R43.2 U10.R13 | length 53.2
  Component Side 1 w0.127: U10.R13@87,152 87.4,152.4 90.4,152.4 91.3,153.3 91.3,153.804 95.913,158.417 124.665,158.417 124.738,158.344 124.738,153.844 125.446,153.136 125.446,150.295 125.8,149.941 125.8,147.1 126,146.9 R43.2@126.525,146.9
LED2: R35.2 U10.U15 | length 47.9
  Component Side 1 w0.127: U10.U15@88.6,153.6 89,154 89.8,154 89.9,154.1 91.237,154.1 95.808,158.671 124.77,158.671 124.992,158.449 124.992,153.949 125.7,153.241 125.7,150.4 126,150.1 R35.2@126.525,150.1
LED3: R41.2 U10.V16 | length 44
  Component Side 1 w0.127: U10.V16@89.4,154.4 91.178,154.4 95.703,158.925 124.875,158.925 125.246,158.554 125.246,154.054 126,153.3 R41.2@126.525,153.3
LED4: R44.2 U10.U16 | length 44
  Component Side 1 w0.127: U10.U16@88.6,154.4 89,154.8 91.218,154.8 97.339,160.921 124.12,160.921 125.5,159.541 125.5,156.9 125.9,156.5 R44.2@126.525,156.5
LED5: R39.2 U10.V17 | length 40.3
  Component Side 1 w0.127: U10.V17@89.4,155.2 91.259,155.2 97.234,161.175 124.225,161.175 125.8,159.6 R39.2@126.525,159.6
LED6: R42.2 U10.U17 | length 41.1
  Component Side 1 w0.127: U10.U17@88.6,155.2 89,155.6 91.3,155.6 97.129,161.429 124.229,161.429 125.6,162.8 R42.2@126.525,162.8
MAIN_3V3: C48.1 J1.40 L3.2 R38.2 R40.2 U18.14 | length 14.3
  Component Side 2 w0.152: C48.1@122.825,113.9 123.825,112.9 125.7,112.9 127.25,114.45 U18.14@127.25,115.7
  Component Side 2 w0.3: v1(122,113.5) 122.425,113.5 C48.1@122.825,113.9 122.425,114.3 v1(122,114.3) ; v1(122,116.7) 121.3,116.7 L3.2@120.9,117.1 L3.2@121.3,117.5 ; v1(122,117.5) L3.2@121.3,117.5 ; R38.2@122.3,119.525 R40.2@121.3,119.525 L3.2@121.3,117.5
MAIN_3V3_PG: J1.38 U18.4 | length 16.6
  Component Side 1 w0.127: J1.38@109.64,119.28 123.82,119.28 v1(124.9,118.2)
  Component Side 2 w0.127: v1(124.9,118.2) 125.25,117.85 U18.4@125.6,117.85
MAIN_PWR: C42.1 C43.1 C44.2 J8.4 J8.6 J8.18 J8.20 U18.10 U18.11 U18.12 U18.13 | length 14.5
  Component Side 2 w0.152: U18.13@127.75,115.7 128.2,115.7 128.4,115.9 U18.12@128.4,116.35 ; U18.10@128.4,117.35 128.75,117.35 129.5,118.1 C44.2@130.125,118.1 130.4,117.825 C42.1@130.4,116.5 ; C42.1@130.375,116.35 C42.1@130.4,116.325
  Component Side 2 w0.25: U18.12@128.4,116.35 130.05,116.35 129.55,116.85 U18.11@128.4,116.85
  Component Side 2 w0.254: C42.1@130.05,116.35 C42.1@130.375,116.35
  Component Side 2 w0.4: v1(134.1,115.6) 133.275,115.6 C43.1@132.7,116.175 133.325,116.8 v1(134.1,116.8)
  Component Side 2 w0.5: C42.1@130.4,116.325 130.55,116.175 C43.1@132.7,116.175
MGT_PWR: J1.19 R29.2 U10.M15 | length 39.9
  Component Side 1 w0.127: U10.M15@84.6,153.6 84.8,153.6 85.2,154 85.6,154 85.8,154.2 85.8,156.9 86.6,157.7 91.2,157.7 v1(91.9,157) ; v1(97.5,153.4) v1(99.3,153.4) ; v1(100.4,146.1) v1(100.4,148.3)
  Component Side 2 w0.127: v1(91.9,157) 94.7,154.2 96.7,154.2 v1(97.5,153.4) ; R29.2@96.8,151.125 97.925,150 99.1,150 100,150.9 ; v1(99.3,153.4) 100,152.7 100,150.9 ; v1(100.4,146.1) 102.4,146.1 105.36,143.14 106.1,143.14 J1.19@107.1,142.14 ; v1(100.4,148.3) 100.4,150.5 100,150.9
MGTSW_RX_N: U10.C3 U16.2 | length 31.1
  Component Side 1 w0.127: v1(75.3,134.6) 75.573,134.327 75.573,123.068 76.648,121.993 76.648,121.3 76.648,121.025 76.648,120.698 76.463,120.698 76.463,120.371 76.648,120.371 76.648,120.044 76.463,120.044 76.463,119.717 76.648,119.717 76.648,119.391 76.463,119.391 76.463,119.064 76.648,119.064 76.648,118.9 76.648,116.687 76.525,116.564 U16.2@76.525,116.075 ; v2(77,143.6) U10.C3@77.4,144
  Component Side 2 w0.127: v1(75.3,134.6) 75.573,134.873 75.573,136.127 74.846,136.854 74.846,140.005 76.1,141.259 76.1,142.1 77,143 v2(77,143.6)
MGTSW_RX_P: U10.C4 U16.1 | length 31.1
  Component Side 1 w0.127: v1(76.1,134.6) 75.827,134.327 75.827,123.173 76.902,122.098 76.902,116.687 77.025,116.564 U16.1@77.025,116.075 ; v2(77,144.4) U10.C4@77.4,144.8
  Component Side 2 w0.127: v1(76.1,134.6) 75.827,134.873 75.827,136.232 75.1,136.959 75.1,139.9 76.354,141.154 76.354,141.995 77.5,143.141 77.5,143.9 77.3,144.1 v2(77,144.4)
MGTSW_SEL: U10.D10 U16.30 | length 59.9
  Component Side 1 w0.127: v1(68.7,134.2) 64.7,134.2 64,134.9 63.5,134.9 63.2,135.2 63.2,135.8 63.5,136.1 64.041,136.1 65.9,137.959 65.9,144.159 70.641,148.9 74.1,148.9 74.6,148.4 77.6,148.4 77.8,148.6 77.8,149 78.2,149.4 U10.D10@78.2,149.6 ; v1(73,111.7) 73,112.6 U16.30@73.025,112.625
  Component Side 2 w0.127: v1(68.7,134.2) 68.7,111.7 69.3,111.1 72.4,111.1 v1(73,111.7)
MGTSW_TX_N: U10.D1 U16.5 | length 29.4
  Component Side 1 w0.127: U16.5@75.025,116.075 75.025,116.564 74.9,116.689 74.9,118 74.9,118.164 74.9,118.49 75.126,118.49 75.126,118.817 74.9,118.817 74.9,119.144 75.126,119.144 75.126,119.471 74.9,119.471 74.9,120.7 74.9,122.259 73.954,123.205 73.954,134.754 77.3,138.1 77.3,139.9 78.054,140.654 78.054,142.254 U10.D1@78.2,142.4
MGTSW_TX_P: U10.D2 U16.6 | length 29.4
  Component Side 1 w0.127: U16.6@74.525,116.075 74.525,116.564 74.646,116.685 74.646,122.154 73.7,123.1 73.7,134.859 77.046,138.205 77.046,140.005 77.8,140.759 77.8,142.8 U10.D2@78.2,143.2
NetC5_2: C5.2 Q1.4 | length 2.1
  Component Side 2 w0.153: Q1.4@120.75,146.35 120.75,145.47 C5.2@121.62,144.6
NetC13_2: C13.2 U4.7 | length 1.5
  Component Side 2 w0.153: U4.7@66.075,149.8 67.2,149.8 C13.2@67.5,150.1
NetC17_2: C17.2 U5.7 | length 1.6
  Component Side 2 w0.153: U5.7@66.075,142.3 67.18,142.3 C17.2@67.5,142.62
NetC18_1: C18.1 L1.1 R20.1 U7.4 | length 7
  Component Side 1 w0.127: R20.1@115.9,155.875 118.175,155.875 U7.4@119.15,154.9
  Component Side 1 w0.3: L1.1@118.99,156.8 L1.1@119,156.79
  Component Side 1 w0.4: L1.1@119,156.79 119,156 119.15,155.85 U7.4@119.15,154.9 ; U7.4@119.23,154.82 C18.1@120.6,154.82
NetC19_1: C19.1 L2.1 R21.1 U8.6 | length 6.2
  Component Side 2 w0.127: R21.1@59.7,155.425 62.075,155.425 62.59,154.91 L2.1@62.59,154.7
  Component Side 2 w0.3: U8.6@62.6,156.35 C19.1@63.9,156.35
  Component Side 2 w0.4: L2.1@62.59,154.5 L2.1@62.59,154.7 ; L2.1@62.59,154.91 U8.6@62.59,156.34
NetC45_1: C45.1 C46.2 | length 1.1
  Component Side 2 w0.3: C45.1@129.8,120.48 C46.2@130.9,120.48
NetC45_2: C45.2 U18.9 | length 2.7
  Component Side 2 w0.25: U18.9@128.65,117.85 129,118.2 129,119.2 129.32,119.52 C45.2@129.8,119.52
  Component Side 2 w0.254: U18.9@128.4,117.85 U18.9@128.65,117.85
NetC46_1: C46.1 C47.2 | length 1.2
  Component Side 2 w0.3: C46.1@130.9,119.52 C47.2@132.1,119.52
NetD2_2: D2.2 R32.1 | length 1.6
  Component Side 1 w0.127: D2.2@57.325,163.1 57.375,163.15 R32.1@57.375,164.7
NetD3_2: D3.2 R33.1 | length 1.7
  Component Side 1 w0.127: D3.2@57.325,155.5 57.375,155.55 R33.1@57.375,157.2
NetD4_2: D4.2 R34.1 | length 1.6
  Component Side 1 w0.127: D4.2@57.275,159.025 57.325,159.075 D4.2@57.325,159.1 R34.1@57.325,160.625
NetD5_2: D5.2 R35.1 | length 1.6
  Component Side 1 w0.127: R35.1@127.475,150.1 D5.2@129.075,150.1
NetD6_2: D6.2 R39.1 | length 1.6
  Component Side 1 w0.127: R39.1@127.475,159.6 D6.2@129.075,159.6
NetD7_2: D7.2 R41.1 | length 1.6
  Component Side 1 w0.127: R41.1@127.475,153.3 D7.2@129.075,153.3
NetD8_2: D8.2 R42.1 | length 1.6
  Component Side 1 w0.127: R42.1@127.475,162.8 D8.2@129.075,162.8
NetD9_2: D9.2 R43.1 | length 1.6
  Component Side 1 w0.127: R43.1@127.475,146.9 D9.2@129.075,146.9
NetD10_2: D10.2 R44.1 | length 1.6
  Component Side 1 w0.127: R44.1@127.475,156.5 D10.2@129.075,156.5
NetL3_1: L3.1 U18.1 U18.2 U18.3 | length 5.3
  Component Side 2 w0.25: L3.1@124.15,117.35 U18.3@125.6,117.35 ; U18.1@125.6,116.35 124.65,116.35 124.15,116.85 U18.2@125.6,116.85
  Component Side 2 w0.3: L3.1@124.15,116.85 L3.1@123.9,117.1 L3.1@124.15,117.35
NetR1_1: R1.1 R2.2 | length 1
  Component Side 2 w0.3: R1.1@95.1,140.525 R2.2@96.1,140.525
NetR2_1: R2.1 R3.2 U1.7 | length 7.3
  Component Side 2 w0.153: U1.7@95.7,138.425 94.725,138.425 94.55,138.6 94.55,139.6 94.7,139.75 96.35,139.75 96.75,140.15 96.75,141.475
  Component Side 2 w0.3: R2.1@96.1,141.475 96.75,141.475 R3.2@97.4,141.475
NetR6_1: R6.1 R7.2 U3.7 | length 6.1
  Component Side 1 w0.153: v1(56.25,142.925) 56.25,144.15 v1(58.188,146.088)
  Component Side 2 w0.153: U3.7@57.4,145.975 58.075,145.975 v1(58.188,146.088)
  Component Side 2 w0.3: R7.2@55.6,142.925 v1(56.25,142.925) R6.1@56.9,142.925
NetR9_1: R9.1 R10.1 U4.8 | length 4
  Component Side 2 w0.153: U4.8@66.075,149.3 68.175,149.3 R9.1@68.8,149.925
  Component Side 2 w0.3: R10.1@68.8,148.875 R9.1@68.8,149.925
NetR12_2: R12.2 R13.2 R14.2 U5.8 | length 5
  Component Side 2 w0.153: U5.8@66.075,141.8 68.175,141.8 R12.2@68.8,142.425
  Component Side 2 w0.3: R12.2@68.8,142.425 R13.2@68.8,141.375 R14.2@69.8,141.375
NetR15_1: R15.1 R16.1 R19.2 U6.5 | length 3.9
  Component Side 2 w0.3: R19.2@122.575,139 123.2,139.625 U6.5@123.2,140.25 123.75,140.25 123.925,140.425 R16.1@124.5,140.425 R15.1@125.5,140.425
NetR20_2: R20.2 U7.1 | length 1.3
  Component Side 1 w0.127: R20.2@115.9,154.925 U7.1@117.225,154.925
NetR21_2: R21.2 U8.1 | length 1.4
  Component Side 2 w0.3: R21.2@59.7,156.375 61.025,156.375 U8.1@60.95,156.3
NetR30_2: R30.2 U10.A6 | length 3.1
  Component Side 1 w0.2: v2(75.1,146.7) 75.3,146.7 75.6,146.4 U10.A6@75.8,146.4
  Component Side 2 w0.2: R30.2@75,144.875 74.5,145.375 74.5,146.1 v2(75.1,146.7)
NetR31_1: R31.1 U10.T14 | length 30.5
  Component Side 1 w0.127: U10.T14@87.8,152.8 88.2,153.2 89.7,153.2 89.9,153 v2@90.1,153 ; v1(93.2,154.5) 94.9,156.2 113.7,156.2 114.8,155.1 R31.1@114.8,153.675
  Component Side 2 w0.127: v2(90.1,152.9) 91.6,152.9 v1(93.2,154.5)
NetR36_2: R36.2 R37.2 U18.5 | length 4
  Component Side 2 w0.152: U18.5@126.25,118.5 126.25,119.05 126.525,119.325 R36.2@126.525,119.9
  Component Side 2 w0.3: R37.2@124.3,120.475 125.225,120.475 125.8,119.9 R36.2@126.525,119.9
NetR37_1: R37.1 R45.2 | length 1
  Component Side 2 w0.3: R45.2@123.3,119.525 R37.1@124.3,119.525
NetR38_1: R38.1 R40.1 R45.1 | length 2
  Component Side 2 w0.3: R40.1@121.3,120.475 R45.1@123.3,120.475
PRG_3V3: J1.34 J2.55 | length 47.2
  Component Side 2 w0.6: J1.34@109.64,124.36 115.25,129.97 115.25,158.05 119.3,162.1 v3(119.3,167.6)
PRG_VIO: J1.32 J2.56 | length 44.2
  Component Side 2 w0.5: J1.32@109.64,126.9 J1.32@109.8,126.9
  Component Side 2 w0.6: J1.32@109.64,126.9 114.2,131.46 114.2,159.3 117.7,162.8 v3(117.7,167.6)
PROG_B: D1.2 J2.49 | length 85.2
  Component Side 1 w0.127: v1(65.5,173.9) 66.159,174.559 105.3,174.559 106.083,173.776 106.083,163.083 104.9,161.9 v1(104.7,161.9)
  Component Side 2 w0.127: v1(65.5,173.9) 66,173.4 69.6,173.4 70.2,172.8 70.2,171.4 70.8,170.8 73.3,170.8 74.04,171.54 J2.49@74.04,172 ; D1.2@97.75,147.75 102.85,147.75 104.7,149.6 v1(104.7,161.9)
PROGRAM_B: D1.1 R26.2 U10.P10 | length 12.5
  Component Side 1 w0.127: U10.P10@86.2,149.6 86.6,149.2 v2(87.4,149.2)
  Component Side 2 w0.127: v2(87.4,149.2) 87.44,149.16 91.125,149.16 91.265,149.3 93.2,149.3 94.3,150.4 94.975,150.4 R26.2@95.7,151.125 95.725,151.125 D1.1@97.1,149.75
PUDC: R28.1 U10.J18 | length 20.7
  Component Side 1 w0.127: v1(79.9,158.8) 79.9,158.5 82.2,156.2 U10.J18@82.2,156
  Component Side 2 w0.127: v1(79.9,158.8) 79.9,158.762 79.95,158.713 80.644,159.407 80.644,161.044 81.4,161.8 84.9,161.8 85.1,161.6 88.941,161.6 92.341,165 R28.1@93.025,165
PWR_RESET: D1.3 J1.54 R17.2 R18.2 U6.3 | length 84.5
  Component Side 1 w0.127: v1(105.2,144.1) 106.1,143.2 116.9,143.2 v1(117.7,142.4)
  Component Side 2 w0.127: D1.3@96.45,147.75 97.1,147.1 102.9,147.1 105.2,144.8 v1(105.2,144.1) ; J1.54@109.64,98.96 108.5,100.1 108.5,102 107.8,102.7 104.1,102.7 102.8,104 102.8,119.4 106.5,123.1 110.2,123.1 116.5,129.4 116.5,141.2 v1(117.7,142.4) 117.7,142.375 R18.2@118.7,141.375
  Component Side 2 w0.3: R18.2@118.7,141.375 120.025,141.375 120.2,141.55 U6.3@121,141.55
Q1_EN: J1.5 J1.17 Q1.3 | length 44.6
  Component Side 1 w0.153: J1.17@107.14,144.64 108.18,143.6 123.5,143.6 124.4,144.5 v1(124.4,146.3)
  Component Side 2 w0.153: J1.17@107.1,144.68 108.22,145.8 111.7,145.8 112.725,146.825 112.725,157.375 111.298,158.802 108.218,158.802 J1.5@107.1,159.92 ; Q1.3@123.45,146.35 123.5,146.4 123.6,146.3 v1(124.4,146.3)
Q1_QOD: J1.7 Q1.5 | length 22.6
  Component Side 1 w0.153: v1(112,147.3) v1(119.6,147.3)
  Component Side 2 w0.153: J1.7@107.1,157.38 108.18,156.3 111.1,156.3 112,155.4 v1(112,147.3) ; v1(119.6,147.3) Q1.5@120.75,147.3
SCONN0_RX_N: C24.1 U10.G3 | length 33.1
  Component Side 1 w0.127: C24.1@68.78,124.7 69.253,125.173 69.5,125.173 70.727,125.173 v1(71,124.9) ; v2(80.2,143.6) U10.G3@80.6,144
  Component Side 2 w0.127: v1(71,124.9) 70.727,125.173 70.222,125.173 69.9,125.495 69.9,126 69.9,126.475 69.819,126.475 69.819,126.802 69.9,126.802 69.9,127.129 69.819,127.129 69.819,127.456 69.9,127.456 69.9,127.783 69.819,127.783 69.819,128.109 69.9,128.109 69.9,128.436 69.9,128.6 69.9,133.159 70.395,133.654 79.595,133.654 79.9,133.959 79.9,140.6 80.7,141.4 80.7,143.1 v2(80.2,143.6)
SCONN0_RX_P: C25.1 U10.G4 | length 33.1
  Component Side 1 w0.127: C25.1@68.78,125.9 69.253,125.427 70.5,125.427 70.727,125.427 v1(71,125.7) ; v2(80.2,144.4) U10.G4@80.6,144.8
  Component Side 2 w0.127: v1(71,125.7) 70.727,125.427 70.327,125.427 70.154,125.6 70.154,133.054 70.5,133.4 79.7,133.4 80.154,133.854 80.154,140.495 80.954,141.295 80.954,143.646 v2(80.2,144.4)
SCONN0_TX_N: C23.1 U10.B1 | length 29.2
  Component Side 1 w0.127: C23.1@68.78,122.3 69.253,121.827 70.3,121.827 70.327,121.827 v1(70.6,122.1) ; v1(73.1,122.1) 72.827,121.827 72.532,121.827 72.4,121.959 72.4,122.2 72.4,123.048 72.566,123.048 72.566,123.375 72.4,123.375 72.4,123.702 72.566,123.702 72.566,124.029 72.4,124.029 72.4,124.356 72.566,124.356 72.566,124.683 72.4,124.683 72.4,125.01 72.566,125.01 72.566,125.337 72.4,125.337 72.4,125.5 72.4,137.441 76.08,141.12 76.454,141.495 76.454,142.095 76.6,142.241 U10.B1@76.6,142.4
  Component Side 2 w0.127: v1(70.6,122.1) 70.873,121.827 72.827,121.827 v1(73.1,122.1)
SCONN0_TX_P: C22.1 U10.B2 | length 29.2
  Component Side 1 w0.127: C22.1@68.78,121.1 69.253,121.573 69.6,121.573 70.327,121.573 v1(70.6,121.3) ; v1(73.1,121.3) 72.827,121.573 72.427,121.573 72.146,121.854 72.146,127.822 72.146,137.546 76.2,141.6 76.2,142.8 U10.B2@76.6,143.2
  Component Side 2 w0.127: v1(70.6,121.3) 70.873,121.573 72.827,121.573 v1(73.1,121.3)
SCONN1_RX_N: C27.1 U16.36 | length 18.6
  Component Side 1 w0.127: C27.1@68.78,102.8 69.253,102.327 74.527,102.327 76.148,103.948 76.148,111.027 ; U16.36@76.025,112.625 76.025,112.137 76.148,112.014 76.148,111.354 ; 76.148,110.863 76.148,111.027 ; 76.148,111.7 76.148,111.681 76.148,111.354 ; 75.938,111.027 76.148,111.027 ; 75.938,111.027 75.938,111.354 ; 75.938,111.027 76.148,111.027 ; 75.938,111.027 75.938,111.354 ; 75.938,111.354 76.148,111.354 ; 75.938,111.354 76.148,111.354
SCONN1_RX_P: C26.1 U16.37 | length 17.4
  Component Side 1 w0.127: C26.1@68.78,101.6 69.253,102.073 74.632,102.073 76.402,103.843 76.402,112.014 76.525,112.137 U16.37@76.525,112.625
SCONN1_TX_N: C28.1 U16.33 | length 11.9
  Component Side 1 w0.127: C28.1@68.78,105.2 69.253,105.673 72.832,105.673 74.402,107.243 74.402,112.014 74.525,112.137 U16.33@74.525,112.625
SCONN1_TX_P: C29.1 U16.32 | length 13.1
  Component Side 1 w0.127: C29.1@68.78,106.4 69.253,105.927 72.727,105.927 74.148,107.348 74.148,110.99 ; U16.32@74.025,112.625 74.025,112.137 74.148,112.014 74.148,111.317 ; 74.148,110.827 74.148,110.99 ; 74.148,111.6 74.148,111.317 ; 73.938,110.99 73.938,111.317 ; 73.938,110.99 74.148,110.99 ; 73.938,110.99 74.148,110.99 ; 73.938,110.99 73.938,111.317 ; 73.938,111.317 74.148,111.317 ; 73.938,111.317 74.148,111.317
SCONN2_RX_N: C32.1 U10.A3 | length 59.7
  Component Side 1 w0.127: v1(69.7,135.1) 69.973,135.373 70.332,135.373 70.8,135.841 70.8,136.7 70.8,138.256 70.905,138.256 70.905,138.583 70.8,138.583 70.8,138.91 70.905,138.91 70.905,139.237 70.8,139.237 70.8,139.4 70.8,140.05 75.023,144.273 75.264,144.273 75.537,144 U10.A3@75.8,144 ; v1(71.6,96.3) 71.327,96.027 71.327,94.9 71.327,94.653 C32.1@71.8,94.18
  Component Side 2 w0.127: v1(69.7,135.1) 69.427,135.373 68.273,135.373 67.627,134.727 67.627,120.027 65.4,117.8 65.4,111.3 71.327,105.373 71.327,96.573 v1(71.6,96.3)
SCONN2_RX_P: C33.1 U10.A4 | length 59.7
  Component Side 1 w0.127: v1(69.7,135.9) 69.973,135.627 70.227,135.627 70.546,135.946 70.546,140.155 74.918,144.527 75.264,144.527 75.537,144.8 U10.A4@75.8,144.8 ; C33.1@70.6,94.18 71.073,94.653 71.073,95.9 71.073,96.027 v1(70.8,96.3)
  Component Side 2 w0.127: v1(69.7,135.9) 69.427,135.627 68.168,135.627 67.373,134.832 67.373,120.132 65.146,117.905 65.146,111.195 71.073,105.268 71.073,96.573 v1(70.8,96.3)
SCONN2_TX_N: C31.1 U10.F1 | length 61.2
  Component Side 1 w0.127: C31.1@74.2,94.18 74.673,94.653 74.673,95.2 74.673,97.027 v1(74.4,97.3) ; v1(78.2,95.6) 78.473,95.873 82.373,95.873 83.454,96.954 83.454,120.846 79.654,124.646 79.654,142.254 U10.F1@79.8,142.4
  Component Side 2 w0.127: v1(74.4,97.3) 74.673,97.027 74.673,96.354 75.154,95.873 77.927,95.873 v1(78.2,95.6)
SCONN2_TX_P: C30.1 U10.F2 | length 61.3
  Component Side 1 w0.127: v1(75.2,97.3) 74.927,97.027 74.927,94.695 74.927,94.653 C30.1@75.4,94.18 ; v1(78.2,96.4) 78.473,96.127 82.268,96.127 83.2,97.059 83.2,120.741 79.4,124.541 79.4,142.8 U10.F2@79.8,143.2
  Component Side 2 w0.127: v1(75.2,97.3) 74.927,97.027 74.927,96.459 75.259,96.127 77.927,96.127 v1(78.2,96.4)
SCONN3_RX_N: C35.1 U10.E3 | length 69.7
  Component Side 1 w0.127: v1(78.1,134.6) 77.827,134.327 77.827,123.773 81.027,120.573 81.027,97.973 v1(81.3,97.7) ; v2(78.6,143.6) U10.E3@79,144 ; C35.1@93.7,94.18 94.173,94.653 94.173,94.695 94.173,96.927 v1(93.9,97.2)
  Component Side 2 w0.127: v1(78.1,134.6) 77.827,134.873 77.827,136.168 79.054,137.395 79.054,140.3 78.1,141.254 78.1,143.364 78.336,143.6 v2(78.6,143.6) ; v1(81.3,97.7) 81.027,97.427 81.027,96.773 81.673,96.127 89.627,96.127 91.275,96.127 91.275,96.392 91.602,96.392 91.602,96.127 91.929,96.127 91.929,96.392 92.256,96.392 92.256,96.127 92.583,96.127 92.583,96.392 92.91,96.392 92.91,96.127 93.237,96.127 93.4,96.127 93.7,96.127 94.173,96.6 94.173,96.927 v1(93.9,97.2)
SCONN3_RX_P: C34.1 U10.E4 | length 69.7
  Component Side 1 w0.127: v1(77.3,134.6) 77.573,134.327 77.573,123.668 80.773,120.468 80.773,97.973 v1(80.5,97.7) ; v2(78.6,144.4) U10.E4@79,144.8 ; v1(94.7,97.2) 94.427,96.927 94.427,95.222 94.427,94.653 C34.1@94.9,94.18
  Component Side 2 w0.127: v1(77.3,134.6) 77.573,134.873 77.573,136.273 78.8,137.5 78.8,140.195 77.846,141.149 77.846,143.469 78.6,144.223 v2(78.6,144.4) ; v1(80.5,97.7) 80.773,97.427 80.773,96.668 81.568,95.873 93.805,95.873 94.427,96.495 94.427,96.927 v1(94.7,97.2)
SCONN3_TX_N: C36.1 U10.H1 | length 55.3
  Component Side 1 w0.127: U10.H1@81.4,142.4 81.4,140.1 82.7,138.8 82.7,125.359 85.854,122.205 85.854,101.1 85.854,100.937 86.025,100.937 86.025,100.61 85.854,100.61 85.854,100.283 86.025,100.283 86.025,99.956 85.854,99.956 85.854,99.629 86.025,99.629 86.025,99.302 85.854,99.302 85.854,97.046 86.773,96.127 90.032,96.127 90.827,95.332 90.827,94.653 C36.1@91.3,94.18
SCONN3_TX_P: C37.1 U10.H2 | length 55.3
  Component Side 1 w0.127: U10.H2@81.4,143.2 81,142.8 81,142.1 81.146,141.954 81.146,139.995 82.446,138.695 82.446,125.254 85.6,122.1 85.6,96.941 86.668,95.873 89.927,95.873 90.573,95.227 90.573,94.653 C37.1@90.1,94.18
SPI-CLK: J2.8 U9.6 U10.E8 | length 84.3
  Component Side 1 w0.127: v1(73.5,159.4) 74.2,160.1 v1(75.4,160.1) ; v2(78.6,147.6) U10.E8@79,148 ; v1(85.465,163.865) U9.6@86.49,163.865 87.865,163.865 89.008,165.008 89.008,167.81 88,168.818 v1(88,170.7)
  Component Side 2 w0.127: v1(73.5,159.4) 73.5,154.559 74.454,153.605 74.454,152.916 74.428,152.889 74.428,152.732 75.854,151.305 75.854,149.605 77.609,147.85 78.35,147.85 v2(78.6,147.6) ; v1(75.4,160.1) 78.2,160.1 80.9,162.8 84.7,162.8 85.465,163.565 v1(85.465,163.865) ; v1(88,170.7) 88,173.4 88.397,173.797 120.703,173.797 121.3,173.2 121.3,171.118 121.618,170.8 126.04,170.8 J2.8@127.38,169.46
SPI-CS: J2.12 R23.2 U9.1 U10.L15 | length 72.3
  Component Side 1 w0.127: U9.1@78.71,166.405 78.71,166.61 v1(79.2,167.1) ; U10.L15@83.8,153.6 84.2,154 84.8,154 85,154.2 85,157.945 90.6,163.545 v1(90.6,166) v1(90.6,167.3)
  Component Side 2 w0.127: v1(79.2,167.1) 89.041,167.1 90.141,166 v1(90.6,166) R23.2@93.025,166 ; v1(90.6,167.3) 90.6,172.8 91.089,173.289 120.492,173.289 120.792,172.99 120.792,170.908 122.24,169.46 J2.12@122.3,169.46
SPI-DQ0: J2.10 U9.5 U10.K16 | length 68.9
  Component Side 1 w0.127: v1(79.9,159.5) 79.9,159.456 80.4,158.956 80.4,158.4 82.609,156.191 82.609,155.791 82.8,155.6 83.2,155.6 83.4,155.4 83.4,154.6 83.2,154.4 U10.K16@83,154.4 ; v1(85.6,162.1) 85.995,162.1 U9.5@86.49,162.595 87.595,162.595 89.262,164.262 89.262,167.916 88.254,168.924 88.254,170.054 v1(88.9,170.7)
  Component Side 2 w0.127: v1@79.9,159.512 v1(79.9,159.5) 80.012,159.5 80.056,159.456 80.39,159.79 80.39,161.26 80.387,161.263 81.224,162.1 v1(85.6,162.1) ; v1(88.9,170.7) 88.254,171.346 88.254,173.295 88.502,173.543 120.597,173.543 121.046,173.095 121.046,171.013 121.513,170.546 123.754,170.546 J2.10@124.84,169.46
SPI-DQ1: J2.4 U9.2 U10.L17 | length 75.3
  Component Side 1 w0.127: U10.L17@83.8,155.2 83.8,155.4 83.4,155.8 83.4,156.198 83.178,156.42 82.78,156.42 82,157.2 81,158.2 81,160 79.954,161.046 79.954,164.146 78.95,165.15 80,166.2 80,167 80.2,167.2 83.9,167.2 85.5,168.8 v1(85.5,170.7)
  Component Side 2 w0.127: v1(85.5,170.7) 85.5,172.841 86.305,173.646 87.527,173.646 88.187,174.305 120.913,174.305 121.664,173.554 127.787,173.554 128.646,172.695 128.646,171.093 129.193,170.546 131.374,170.546 J2.4@132.46,169.46
SPI-DQ2: J2.2 U9.3 U10.J15 | length 82.5
  Component Side 1 w0.127: U10.J15@82.2,153.6 81.8,154 81.8,154.6 81.6,154.8 81.2,154.8 81,155 81,156.5 78.7,158.8 78.7,160 79.7,161 79.7,163.5 79.335,163.865 U9.3@78.71,163.865 78.71,163.89 77.8,164.8 77.8,165.5 78.1,165.8 79.241,165.8 79.746,166.305 79.746,167.105 80.095,167.454 83.795,167.454 85.246,168.905 85.246,170.054 v1(84.6,170.7)
  Component Side 2 w0.127: v1(84.6,170.7) 85.246,171.346 85.246,172.946 86.2,173.9 87.422,173.9 88.082,174.559 121.018,174.559 121.77,173.808 127.892,173.808 128.9,172.8 128.9,171.198 129.298,170.8 133.66,170.8 J2.2@135,169.46
SPI-DQ3: J2.6 U9.7 U10.J16 | length 74.9
  Component Side 1 w0.127: v1(79.9,160.2) 79.8,160.2 79.3,159.7 79.3,158.7 81.8,156.2 81.8,155.046 82.038,154.808 82.042,154.808 82.2,154.651 U10.J16@82.2,154.4 ; v1(85.455,165.1) 86.455,165.1 U9.7@86.49,165.135 88.235,165.135 88.754,165.654 88.754,167.705 87.746,168.713 87.746,170.054 v1(87.1,170.7)
  Component Side 2 w0.127: v1(79.9,160.2) 80,160.2 80.1,160.3 80.1,161.5 81.046,162.446 84.946,162.446 85.978,163.478 85.978,164.222 85.455,164.745 v1(85.455,165.1) ; v1(87.1,170.7) 87.746,171.346 87.746,173.505 88.292,174.051 120.808,174.051 121.559,173.3 127.682,173.3 128.392,172.59 128.392,170.988 J2.6@129.92,169.46
TCK: J2.58 U10.F8 | length 79
  Component Side 1 w0.127: v1(62.3,164.7) 62.9,165.3 62.9,165.464 62.9,165.791 65.536,165.791 65.536,166.118 62.9,166.118 59.764,166.118 59.764,166.445 62.9,166.445 65.536,166.445 65.536,166.772 62.9,166.772 59.764,166.772 59.764,167.098 62.9,167.098 65.536,167.098 65.536,167.425 62.9,167.425 59.764,167.425 59.764,167.752 62.9,167.752 65.536,167.752 65.536,168.079 62.9,168.079 62.9,168.406 62.9,168.48 J2.58@63.88,169.46 ; v2(79.4,147.6) U10.F8@79.8,148
  Component Side 2 w0.127: v1(62.3,164.7) 63.246,165.646 70.454,165.646 71.7,164.4 71.7,156 74.2,153.5 74.2,153.021 74.174,152.995 74.174,152.626 75.6,151.2 75.6,149.5 77.8,147.3 77.8,146.9 78.4,146.3 78.8,146.3 79.4,146.9 v2(79.4,147.6)
TDI: J2.52 U10.T9 | length 75.8
  Component Side 1 w0.127: J2.52@71.66,169.46 J2.52@71.5,169.46 71.5,169.7 70.454,170.746 70.454,172.776 71.222,173.543 102.716,173.543 103.254,173.005 103.254,163.654 102.829,163.229 v1(102.829,163) ; U10.T9@87.8,148.8 88.2,149.2 89.6,149.2 89.8,149 90.5,149 90.7,149.2 101.518,149.2 102.829,150.511 v1(102.829,155.2)
  Component Side 2 w0.127: v1(102.829,155.2) v1(102.829,163)
TDO: J2.54 U10.T8 | length 77.9
  Component Side 1 w0.127: J2.54@68.96,169.46 70.2,170.7 70.2,172.881 71.117,173.797 102.821,173.797 103.508,173.11 103.508,163.549 103.38,163.42 v1(103.8,163) ; U10.T8@87.8,148 88.2,148.4 90.65,148.4 91.15,148.9 101.578,148.9 103.083,150.405 103.083,154.483 v1(103.8,155.2)
  Component Side 2 w0.127: v1(103.8,155.2) 103.2,155.8 103.2,162.3 103.8,162.9 v1(103.8,163)
TMS: J2.50 U10.R8 | length 74.9
  Component Side 1 w0.127: J2.50@74.04,169.46 72.8,170.7 72.8,172.489 73.6,173.289 102.611,173.289 103,172.9 103,164.1 v1(101.9,163) ; U10.R8@87,148 v2(87.4,147.6) ; v1(94.6,149.7) 94.825,149.475 101.434,149.475 102.575,150.616 102.575,154.525 v1(101.9,155.2)
  Component Side 2 w0.127: v2(87.4,147.6) 88.7,148.9 93.8,148.9 v1(94.6,149.7) ; v1(101.9,155.2) 102.5,155.8 102.5,162.4 v1(101.9,163)
U1_EN: J1.2 U1.1 | length 42
  Component Side 2 w0.127: U1.1@97.9,139.075 99.175,139.075 101.2,141.1 112,141.1 112.992,142.092 112.992,164.008 112,165 J1.2@109.64,165
U1_PG: J1.4 J1.6 R4.1 U1.2 | length 48.4
  Component Side 1 w0.127: v1(111.2,164.4) v1(111.2,165.6)
  Component Side 2 w0.127: U1.2@97.9,138.425 98.725,138.425 98.875,138.575 99.435,138.575 101.56,140.7 112.1,140.7 113.246,141.846 113.246,164.754 112.4,165.6 v1(111.2,165.6) ; J1.6@109.64,159.92 J1.4@109.64,162.46 111.2,164.02 v1(111.2,164.4)
U2_EN: J1.3 U2.2 | length 63.1
  Component Side 1 w0.127: v1(67.35,164.65) v1(67.35,167.45) ; v1(112.5,166.324) v1(114.3,166.324)
  Component Side 2 w0.127: U2.2@67.35,163.375 v1(67.35,164.65) ; v1(67.35,167.45) 77.65,167.45 78.2,168 88.5,168 89.9,166.6 99.241,166.6 100.87,168.229 112.395,168.229 v1(114.3,166.324) ; J1.3@107.1,162.46 108.5,163.86 108.5,165.6 109.224,166.324 v1(112.5,166.324)
U3_EN: J1.12 J1.20 U3.1 | length 265.6
  Component Side 1 w0.127: J1.12@109.64,152.3 112.04,149.9 v1(116.2,149.9) ; v1(111.1,148.8) 111.1,146 v1(112,145.1)
  Component Side 2 w0.127: U3.1@55.2,145.325 54.45,144.575 54.45,87.938 63.584,78.804 119.616,78.804 121.504,80.692 132.59,80.692 132.807,80.475 140.21,80.475 141.971,82.236 141.971,150.041 139.916,152.096 120.196,152.096 118,149.9 v1(116.2,149.9) ; J1.20@109.64,142.14 112.04,142.14 112.738,142.838 112.738,144.362 v1(112,145.1) ; v1(111.1,148.8) v1(111.1,150.9)
U3_PG: J1.14 R5.1 U3.2 | length 256.5
  Component Side 1 w0.127: J1.14@109.64,149.76 111.24,149.76 112.2,148.8 116.1,148.8 v1(118.2,150.9)
  Component Side 2 w0.127: R5.1@53.6,145.825 54.125,145.825 ; U3.2@55.2,145.975 54.275,145.975 54.2,145.9 54.2,145.008 54.196,145.004 54.196,87.833 63.479,78.55 119.721,78.55 121.609,80.438 132.484,80.438 132.701,80.221 140.316,80.221 142.225,82.13 142.225,150.146 140.021,152.35 119.75,152.35 118.3,150.9 v1(118.2,150.9)
U4_EN: J1.13 U4.5 | length 281.9
  Component Side 1 w0.127: J1.13@107.1,149.76 108.346,151.006 108.346,152.946 108.954,153.554 110.305,153.554 110.954,152.905 110.954,152.305 112.059,151.2 v1(116.2,151.2)
  Component Side 2 w0.127: U4.5@63.125,150.3 62.8,150.3 62.5,150.6 62.5,152 62.1,152.4 54.805,152.4 52.6,150.195 52.6,144.941 53.688,143.853 53.688,87.623 63.269,78.042 119.931,78.042 121.819,79.93 132.274,79.93 132.491,79.713 140.526,79.713 142.733,81.92 142.733,150.356 140.231,152.858 133.542,152.858 132.5,153.9 131.3,153.9 130.258,152.858 117.358,152.858 116.2,151.7 v1(116.2,151.2)
U4_PG: J1.15 R8.1 U4.3 | length 281.6
  Component Side 1 w0.127: J1.15@107.1,147.22 108.6,148.72 108.6,152.841 109.059,153.3 110.2,153.3 110.7,152.8 110.7,152.2 112.4,150.5 v1(117,150.5)
  Component Side 2 w0.127: U4.3@63.125,149.3 61.025,149.3 R8.1@60.4,149.925 59.925,149.925 57.704,152.146 54.91,152.146 52.9,150.136 52.9,145 53.942,143.958 53.942,87.728 63.374,78.296 119.826,78.296 121.714,80.184 132.379,80.184 132.596,79.967 140.421,79.967 142.479,82.025 142.479,150.251 140.126,152.604 118.304,152.604 117,151.3 v1(117,150.5)